# Altium PCB PCB1.PcbDoc (part 3 of 3)
Units mm, origin at the board's own origin, x right, y up, seen from the top; angles counter-clockwise.
Board outline 100 x 100 mm, 2 copper layers (Top Layer, Bottom Layer); 16 components, 62 nets, 154 pads, 113 vias.
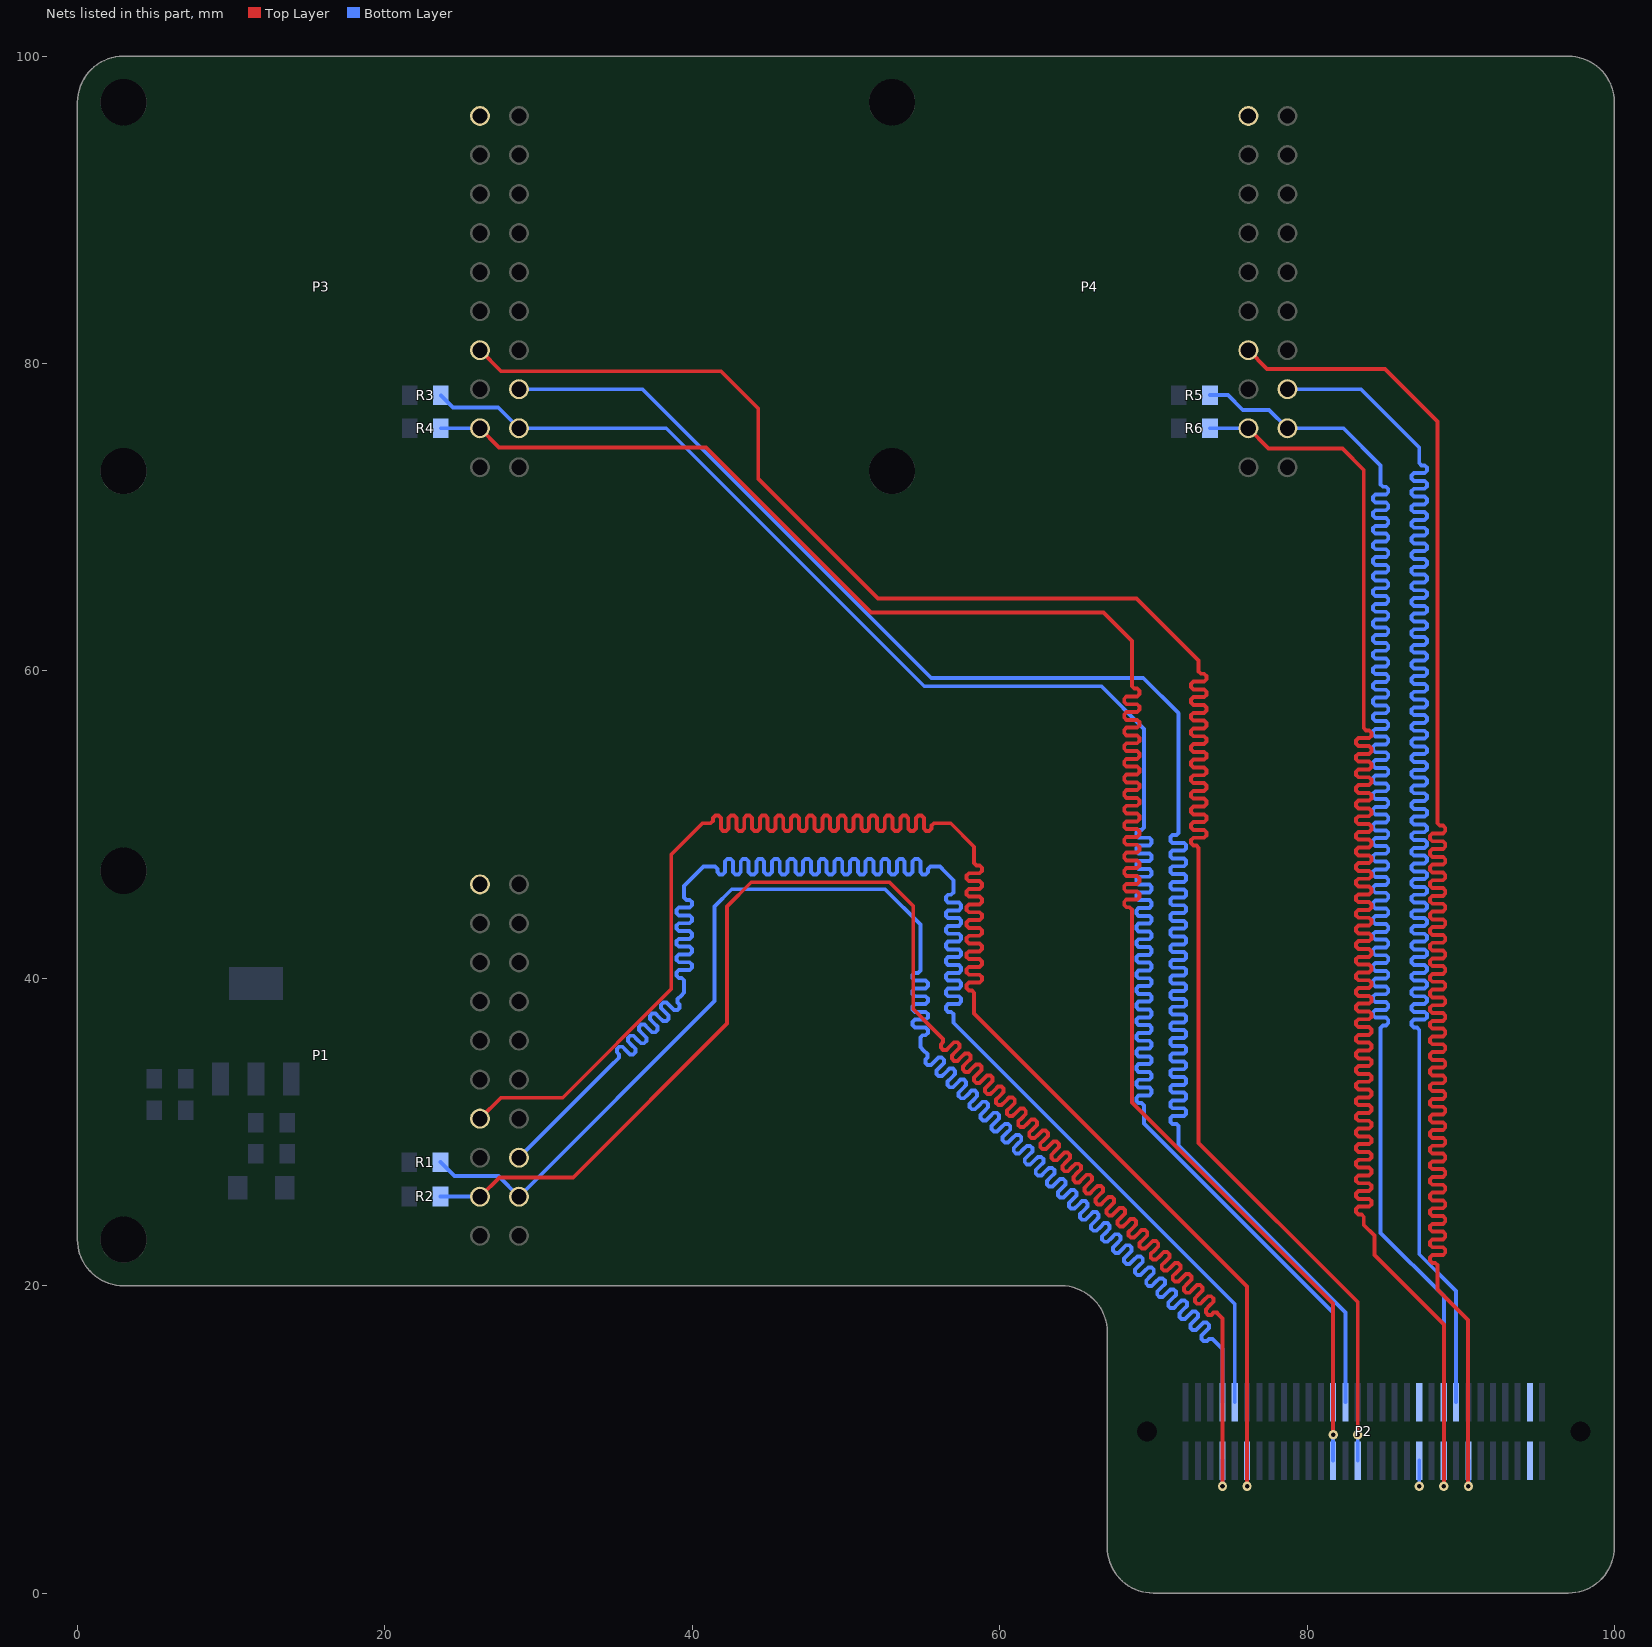
[diagram p3: the nets of this part, all layers, seen from the top]

## Via types
v1: diameter 1, hole 0.5, Top Layer to Bottom Layer, 87 vias
v2: diameter 0.6, hole 0.3, Top Layer to Bottom Layer, 22 vias
v3: diameter 0.8, hole 0.4, Top Layer to Bottom Layer, 2 vias
v4: diameter 3, hole 3, Top Layer to Bottom Layer, 2 vias

## Nets (pads, with @x,y where several pads share a name; then routed paths per layer and width w, separated by ;. In a path a pad name is that pad's centre, name@x,y a point inside that pad or via, vN(x,y) a via of type N, cw(c..) or ccw(c..) an arc to the next point about the centre after c; other vN are vias at no path point) (continued)
SCK_1: P1.3 P2.7 R1.2 | length 132.3
  Bottom Layer w0.254: R1.2@23.622,28.042 24.536,27.127 27.391,27.127 P1.3@28.727,25.791 41.453,38.517 41.453,44.679 42.57,45.796 52.553,45.796 54.839,43.51 54.839,42.621 54.839,40.513 54.686,40.361 54.491,40.361 54.339,40.208 54.339,40.005 54.491,39.853 54.839,39.853 55.186,39.853 55.339,39.7 55.339,39.497 55.186,39.345 54.839,39.345 54.491,39.345 54.339,39.192 54.339,38.989 54.491,38.837 54.839,38.837 55.186,38.837 55.339,38.684 55.339,38.481 55.186,38.329 54.839,38.329 54.491,38.329 54.339,38.176 54.339,37.973 54.491,37.821 54.839,37.821 55.186,37.821 55.339,37.668 55.339,37.465 55.186,37.313 54.839,37.313 54.491,37.313 54.339,37.16 54.339,36.957 54.491,36.805 54.839,36.805 55.186,36.805 55.339,36.652 55.339,36.449 55.186,36.297 54.991,36.297 54.839,36.144 54.839,35.789 54.839,35.535 55.055,35.318 55.307,35.066 55.307,34.851 55.169,34.713 55.169,34.497 55.313,34.354 55.528,34.354 55.774,34.599 56.02,34.845 56.235,34.845 56.379,34.701 56.379,34.486 56.133,34.24 55.887,33.994 55.887,33.779 56.031,33.635 56.247,33.635 56.492,33.881 56.738,34.127 56.954,34.127 57.097,33.983 57.097,33.767 56.852,33.522 56.606,33.276 56.606,33.06 56.749,32.917 56.965,32.917 57.211,33.162 57.457,33.408 57.672,33.408 57.816,33.265 57.816,33.049 57.57,32.803 57.324,32.557 57.324,32.342 57.468,32.198 57.683,32.198 57.929,32.444 58.175,32.69 58.39,32.69 58.534,32.546 58.534,32.331 58.288,32.085 58.043,31.839 58.043,31.624 58.186,31.48 58.402,31.48 58.648,31.726 58.893,31.971 59.109,31.971 59.253,31.828 59.253,31.612 59.007,31.366 58.761,31.121 58.761,30.905 58.905,30.761 59.12,30.761 59.366,31.007 59.612,31.253 59.827,31.253 59.971,31.109 59.971,30.894 59.725,30.648 59.479,30.402 59.479,30.187 59.623,30.043 59.839,30.043 60.084,30.289 60.33,30.535 60.546,30.535 60.689,30.391 60.689,30.175 60.444,29.93 60.198,29.684 60.198,29.468 60.342,29.325 60.557,29.325 60.803,29.57 61.049,29.816 61.264,29.816 61.408,29.672 61.408,29.457 61.162,29.211 60.916,28.965 60.916,28.75 61.06,28.606 61.275,28.606 61.521,28.852 61.767,29.098 61.983,29.098 62.126,28.954 62.126,28.739 61.88,28.493 61.635,28.247 61.635,28.031 61.778,27.888 61.994,27.888 62.24,28.134 62.485,28.379 62.701,28.379 62.845,28.236 62.845,28.02 62.599,27.774 62.353,27.529 62.353,27.313 62.497,27.169 62.712,27.169 62.958,27.415 63.204,27.661 63.419,27.661 63.563,27.517 63.563,27.302 63.317,27.056 63.072,26.81 63.072,26.595 63.215,26.451 63.431,26.451 63.677,26.697 63.922,26.942 64.138,26.942 64.282,26.799 64.282,26.583 64.036,26.337 63.79,26.092 63.79,25.876 63.934,25.732 64.149,25.732 64.395,25.978 64.641,26.224 64.856,26.224 65,26.08 65,25.865 64.754,25.619 64.508,25.373 64.508,25.158 64.652,25.014 64.868,25.014 65.113,25.26 65.359,25.506 65.575,25.506 65.718,25.362 65.718,25.146 65.473,24.901 65.227,24.655 65.227,24.439 65.37,24.296 65.586,24.296 65.832,24.541 66.078,24.787 66.293,24.787 66.437,24.644 66.437,24.428 66.191,24.182 65.945,23.936 65.945,23.721 66.089,23.577 66.304,23.577 66.55,23.823 66.796,24.069 67.012,24.069 67.155,23.925 67.155,23.71 66.909,23.464 66.664,23.218 66.664,23.002 66.807,22.859 67.023,22.859 67.269,23.105 67.514,23.35 67.73,23.35 67.874,23.207 67.874,22.991 67.628,22.745 67.382,22.5 67.382,22.284 67.526,22.14 67.741,22.14 67.987,22.386 68.233,22.632 68.448,22.632 68.592,22.488 68.592,22.273 68.346,22.027 68.1,21.781 68.1,21.566 68.244,21.422 68.46,21.422 68.705,21.668 68.951,21.914 69.167,21.914 69.31,21.77 69.31,21.554 69.065,21.309 68.819,21.063 68.819,20.847 68.963,20.704 69.178,20.704 69.424,20.949 69.67,21.195 69.885,21.195 70.029,21.051 70.029,20.836 69.783,20.59 69.537,20.344 69.537,20.129 69.681,19.985 69.896,19.985 70.142,20.231 70.388,20.477 70.604,20.477 70.747,20.333 70.747,20.117 70.502,19.872 70.256,19.626 70.256,19.41 70.399,19.267 70.615,19.267 70.861,19.512 71.107,19.758 71.322,19.758 71.466,19.615 71.466,19.399 71.22,19.153 70.974,18.907 70.974,18.692 71.118,18.548 71.333,18.548 71.579,18.794 71.825,19.04 72.04,19.04 72.184,18.896 72.184,18.681 71.938,18.435 71.693,18.189 71.693,17.974 71.836,17.83 72.052,17.83 72.298,18.076 72.543,18.321 72.759,18.321 72.903,18.178 72.903,17.962 72.657,17.716 72.411,17.471 72.411,17.255 72.555,17.111 72.77,17.111 73.016,17.357 73.262,17.603 73.477,17.603 73.621,17.459 73.621,17.244 73.375,16.998 73.129,16.752 73.129,16.537 73.273,16.393 73.489,16.393 73.627,16.531 73.842,16.531 73.914,16.459 74.5,15.873 P2.7@74.5,12.425
SCK_2: P2.25 P3.3 R3.2 | length 132.2
  Bottom Layer w0.254: R3.2@23.647,77.927 24.435,77.14 27.379,77.14 P3.3@28.727,75.791 38.306,75.791 55.093,59.004 66.624,59.004 69.393,56.236 69.393,53.721 69.393,49.809 69.24,49.657 69.045,49.657 68.893,49.505 68.893,49.301 69.045,49.149 69.393,49.149 69.74,49.149 69.893,48.997 69.893,48.793 69.74,48.641 69.393,48.641 69.045,48.641 68.893,48.489 68.893,48.285 69.045,48.133 69.393,48.133 69.74,48.133 69.893,47.981 69.893,47.777 69.74,47.625 69.393,47.625 69.045,47.625 68.893,47.473 68.893,47.269 69.045,47.117 69.393,47.117 69.74,47.117 69.893,46.965 69.893,46.761 69.74,46.609 69.393,46.609 69.045,46.609 68.893,46.457 68.893,46.253 69.045,46.101 69.393,46.101 69.74,46.101 69.893,45.949 69.893,45.745 69.74,45.593 69.393,45.593 69.045,45.593 68.893,45.441 68.893,45.237 69.045,45.085 69.393,45.085 69.74,45.085 69.893,44.933 69.893,44.729 69.74,44.577 69.393,44.577 69.045,44.577 68.893,44.425 68.893,44.221 69.045,44.069 69.393,44.069 69.74,44.069 69.893,43.917 69.893,43.713 69.74,43.561 69.393,43.561 69.045,43.561 68.893,43.409 68.893,43.205 69.045,43.053 69.393,43.053 69.74,43.053 69.893,42.901 69.893,42.697 69.74,42.545 69.393,42.545 69.045,42.545 68.893,42.393 68.893,42.189 69.045,42.037 69.393,42.037 69.74,42.037 69.893,41.885 69.893,41.681 69.74,41.529 69.393,41.529 69.045,41.529 68.893,41.377 68.893,41.173 69.045,41.021 69.393,41.021 69.74,41.021 69.893,40.869 69.893,40.665 69.74,40.513 69.393,40.513 69.045,40.513 68.893,40.361 68.893,40.157 69.045,40.005 69.393,40.005 69.74,40.005 69.893,39.853 69.893,39.649 69.74,39.497 69.393,39.497 69.045,39.497 68.893,39.345 68.893,39.141 69.045,38.989 69.393,38.989 69.74,38.989 69.893,38.837 69.893,38.633 69.74,38.481 69.393,38.481 69.045,38.481 68.893,38.329 68.893,38.125 69.045,37.973 69.393,37.973 69.74,37.973 69.893,37.821 69.893,37.617 69.74,37.465 69.393,37.465 69.045,37.465 68.893,37.313 68.893,37.109 69.045,36.957 69.393,36.957 69.74,36.957 69.893,36.805 69.893,36.601 69.74,36.449 69.393,36.449 69.045,36.449 68.893,36.297 68.893,36.093 69.045,35.941 69.393,35.941 69.74,35.941 69.893,35.789 69.893,35.585 69.74,35.433 69.393,35.433 69.045,35.433 68.893,35.281 68.893,35.077 69.045,34.925 69.393,34.925 69.74,34.925 69.893,34.773 69.893,34.569 69.74,34.417 69.393,34.417 69.045,34.417 68.893,34.265 68.893,34.061 69.045,33.909 69.393,33.909 69.74,33.909 69.893,33.757 69.893,33.553 69.74,33.401 69.393,33.401 69.045,33.401 68.893,33.249 68.893,33.045 69.045,32.893 69.393,32.893 69.74,32.893 69.893,32.741 69.893,32.537 69.74,32.385 69.393,32.385 69.045,32.385 68.893,32.233 68.893,32.029 69.045,31.877 69.24,31.877 69.393,31.725 69.393,31.623 69.393,30.556 81.7,18.249 P2.25@81.7,12.425
SCK_3: P2.43 P4.3 R5.2 | length 132.2
  Bottom Layer w0.254: R5.2@73.685,77.953 74.854,77.953 75.819,76.987 77.531,76.987 P4.3@78.727,75.791 82.375,75.791 84.785,73.381 84.785,72.238 84.785,72.136 84.938,71.984 85.133,71.984 85.285,71.831 85.285,71.628 85.133,71.476 84.785,71.476 84.438,71.476 84.285,71.323 84.285,71.12 84.438,70.968 84.785,70.968 85.133,70.968 85.285,70.815 85.285,70.612 85.133,70.46 84.785,70.46 84.438,70.46 84.285,70.307 84.285,70.104 84.438,69.952 84.785,69.952 85.133,69.952 85.285,69.799 85.285,69.596 85.133,69.444 84.785,69.444 84.438,69.444 84.285,69.291 84.285,69.088 84.438,68.936 84.785,68.936 85.133,68.936 85.285,68.783 85.285,68.58 85.133,68.428 84.785,68.428 84.438,68.428 84.285,68.275 84.285,68.072 84.438,67.92 84.785,67.92 85.133,67.92 85.285,67.767 85.285,67.564 85.133,67.412 84.785,67.412 84.438,67.412 84.285,67.259 84.285,67.056 84.438,66.904 84.785,66.904 85.133,66.904 85.285,66.751 85.285,66.548 85.133,66.396 84.785,66.396 84.438,66.396 84.285,66.243 84.285,66.04 84.438,65.888 84.785,65.888 85.133,65.888 85.285,65.735 85.285,65.532 85.133,65.38 84.785,65.38 84.438,65.38 84.285,65.227 84.285,65.024 84.438,64.872 84.785,64.872 85.133,64.872 85.285,64.719 85.285,64.516 85.133,64.364 84.785,64.364 84.438,64.364 84.285,64.211 84.285,64.008 84.438,63.856 84.785,63.856 85.133,63.856 85.285,63.703 85.285,63.5 85.133,63.348 84.785,63.348 84.438,63.348 84.285,63.195 84.285,62.992 84.438,62.84 84.785,62.84 85.133,62.84 85.285,62.687 85.285,62.484 85.133,62.332 84.785,62.332 84.438,62.332 84.285,62.179 84.285,61.976 84.438,61.824 84.785,61.824 85.133,61.824 85.285,61.671 85.285,61.468 85.133,61.316 84.785,61.316 84.438,61.316 84.285,61.163 84.285,60.96 84.438,60.808 84.785,60.808 85.133,60.808 85.285,60.655 85.285,60.452 85.133,60.3 84.785,60.3 84.438,60.3 84.285,60.147 84.285,59.944 84.438,59.792 84.785,59.792 85.133,59.792 85.285,59.639 85.285,59.436 85.133,59.284 84.785,59.284 84.438,59.284 84.285,59.131 84.285,58.928 84.438,58.776 84.785,58.776 85.133,58.776 85.285,58.623 85.285,58.42 85.133,58.268 84.785,58.268 84.438,58.268 84.285,58.115 84.285,57.912 84.438,57.76 84.785,57.76 85.133,57.76 85.285,57.607 85.285,57.404 85.133,57.252 84.785,57.252 84.438,57.252 84.285,57.099 84.285,56.896 84.438,56.744 84.785,56.744 85.133,56.744 85.285,56.591 85.285,56.388 85.133,56.236 84.785,56.236 84.438,56.236 84.285,56.083 84.285,55.88 84.438,55.728 84.785,55.728 85.133,55.728 85.285,55.575 85.285,55.372 85.133,55.22 84.785,55.22 84.438,55.22 84.285,55.067 84.285,54.864 84.438,54.712 84.785,54.712 85.133,54.712 85.285,54.559 85.285,54.356 85.133,54.204 84.785,54.204 84.438,54.204 84.285,54.051 84.285,53.848 84.438,53.696 84.785,53.696 85.133,53.696 85.285,53.543 85.285,53.34 85.133,53.188 84.785,53.188 84.438,53.188 84.285,53.035 84.285,52.832 84.438,52.68 84.785,52.68 85.133,52.68 85.285,52.527 85.285,52.324 85.133,52.172 84.785,52.172 84.438,52.172 84.285,52.019 84.285,51.816 84.438,51.664 84.785,51.664 85.133,51.664 85.285,51.511 85.285,51.308 85.133,51.156 84.785,51.156 84.438,51.156 84.285,51.003 84.285,50.8 84.438,50.648 84.785,50.648 85.133,50.648 85.285,50.495 85.285,50.292 85.133,50.14 84.785,50.14 84.438,50.14 84.285,49.987 84.285,49.784 84.438,49.632 84.785,49.632 85.133,49.632 85.285,49.479 85.285,49.276 85.133,49.124 84.785,49.124 84.438,49.124 84.285,48.971 84.285,48.768 84.438,48.616 84.785,48.616 85.133,48.616 85.285,48.463 85.285,48.26 85.133,48.108 84.785,48.108 84.438,48.108 84.285,47.955 84.285,47.752 84.438,47.6 84.785,47.6 85.133,47.6 85.285,47.447 85.285,47.244 85.133,47.092 84.785,47.092 84.438,47.092 84.285,46.939 84.285,46.736 84.438,46.584 84.785,46.584 85.133,46.584 85.285,46.431 85.285,46.228 85.133,46.076 84.785,46.076 84.438,46.076 84.285,45.923 84.285,45.72 84.438,45.568 84.785,45.568 85.133,45.568 85.285,45.415 85.285,45.212 85.133,45.06 84.785,45.06 84.438,45.06 84.285,44.907 84.285,44.704 84.438,44.552 84.785,44.552 85.133,44.552 85.285,44.399 85.285,44.196 85.133,44.044 84.785,44.044 84.438,44.044 84.285,43.891 84.285,43.688 84.438,43.536 84.785,43.536 85.133,43.536 85.285,43.383 85.285,43.18 85.133,43.028 84.785,43.028 84.438,43.028 84.285,42.875 84.285,42.672 84.438,42.52 84.785,42.52 85.133,42.52 85.285,42.367 85.285,42.164 85.133,42.012 84.785,42.012 84.438,42.012 84.285,41.859 84.285,41.656 84.438,41.504 84.785,41.504 85.133,41.504 85.285,41.351 85.285,41.148 85.133,40.996 84.785,40.996 84.438,40.996 84.285,40.843 84.285,40.64 84.438,40.488 84.785,40.488 85.133,40.488 85.285,40.335 85.285,40.132 85.133,39.98 84.785,39.98 84.438,39.98 84.285,39.827 84.285,39.624 84.438,39.472 84.785,39.472 85.133,39.472 85.285,39.319 85.285,39.116 85.133,38.964 84.785,38.964 84.438,38.964 84.285,38.811 84.285,38.608 84.438,38.456 84.785,38.456 85.133,38.456 85.285,38.303 85.285,38.1 85.133,37.948 84.785,37.948 84.438,37.948 84.285,37.795 84.285,37.592 84.438,37.44 84.785,37.44 85.133,37.44 85.285,37.287 85.285,37.084 85.133,36.932 84.938,36.932 84.785,36.779 84.785,33.045 84.785,23.444 88.9,19.329 P2.43@88.9,12.425
SDA_1: P1.4 P2.8 R2.2 | length 132.2
  Top Layer w0.254: P1.4@26.187,25.791 27.447,27.051 32.258,27.051 42.266,37.059 42.266,44.679 43.84,46.253 52.832,46.253 54.381,44.704 54.381,37.998 55.639,36.741 56.317,36.062 56.317,35.847 56.179,35.709 56.179,35.493 56.323,35.35 56.539,35.35 56.784,35.595 57.03,35.841 57.246,35.841 57.389,35.698 57.389,35.482 57.144,35.236 56.898,34.99 56.898,34.775 57.042,34.631 57.257,34.631 57.503,34.877 57.749,35.123 57.964,35.123 58.108,34.979 58.108,34.764 57.862,34.518 57.616,34.272 57.616,34.056 57.76,33.913 57.975,33.913 58.221,34.159 58.467,34.404 58.683,34.404 58.826,34.261 58.826,34.045 58.58,33.799 58.335,33.554 58.335,33.338 58.478,33.194 58.694,33.194 58.94,33.44 59.185,33.686 59.401,33.686 59.545,33.542 59.545,33.327 59.299,33.081 59.053,32.835 59.053,32.62 59.197,32.476 59.412,32.476 59.658,32.722 59.904,32.968 60.119,32.968 60.263,32.824 60.263,32.608 60.017,32.363 59.772,32.117 59.772,31.901 59.915,31.758 60.131,31.758 60.377,32.003 60.622,32.249 60.838,32.249 60.982,32.105 60.982,31.89 60.736,31.644 60.49,31.398 60.49,31.183 60.634,31.039 60.849,31.039 61.095,31.285 61.341,31.531 61.556,31.531 61.7,31.387 61.7,31.171 61.454,30.926 61.208,30.68 61.208,30.464 61.352,30.321 61.568,30.321 61.813,30.566 62.059,30.812 62.275,30.812 62.418,30.669 62.418,30.453 62.173,30.207 61.927,29.961 61.927,29.746 62.07,29.602 62.286,29.602 62.532,29.848 62.778,30.094 62.993,30.094 63.137,29.95 63.137,29.735 62.891,29.489 62.645,29.243 62.645,29.028 62.789,28.884 63.004,28.884 63.25,29.13 63.496,29.375 63.712,29.375 63.855,29.232 63.855,29.016 63.609,28.77 63.364,28.525 63.364,28.309 63.507,28.165 63.723,28.165 63.969,28.411 64.214,28.657 64.43,28.657 64.574,28.513 64.574,28.298 64.328,28.052 64.082,27.806 64.082,27.591 64.226,27.447 64.441,27.447 64.687,27.693 64.933,27.939 65.148,27.939 65.292,27.795 65.292,27.579 65.046,27.334 64.8,27.088 64.8,26.872 64.944,26.729 65.16,26.729 65.405,26.974 65.651,27.22 65.867,27.22 66.01,27.076 66.01,26.861 65.765,26.615 65.519,26.369 65.519,26.154 65.663,26.01 65.878,26.01 66.124,26.256 66.37,26.502 66.585,26.502 66.729,26.358 66.729,26.143 66.483,25.897 66.237,25.651 66.237,25.435 66.381,25.292 66.596,25.292 66.842,25.538 67.088,25.783 67.304,25.783 67.447,25.64 67.447,25.424 67.202,25.178 66.956,24.933 66.956,24.717 67.099,24.573 67.315,24.573 67.561,24.819 67.807,25.065 68.022,25.065 68.166,24.921 68.166,24.706 67.92,24.46 67.674,24.214 67.674,23.999 67.818,23.855 68.033,23.855 68.279,24.101 68.525,24.346 68.74,24.346 68.884,24.203 68.884,23.987 68.638,23.741 68.393,23.496 68.393,23.28 68.536,23.136 68.752,23.136 68.998,23.382 69.243,23.628 69.459,23.628 69.603,23.484 69.603,23.269 69.357,23.023 69.111,22.777 69.111,22.562 69.255,22.418 69.47,22.418 69.716,22.664 69.962,22.91 70.177,22.91 70.321,22.766 70.321,22.55 70.075,22.305 69.829,22.059 69.829,21.843 69.973,21.7 70.189,21.7 70.434,21.945 70.68,22.191 70.896,22.191 71.039,22.048 71.039,21.832 70.794,21.586 70.548,21.34 70.548,21.125 70.691,20.981 70.907,20.981 71.153,21.227 71.399,21.473 71.614,21.473 71.758,21.329 71.758,21.114 71.512,20.868 71.266,20.622 71.266,20.406 71.41,20.263 71.625,20.263 71.871,20.509 72.117,20.754 72.333,20.754 72.476,20.611 72.476,20.395 72.23,20.149 71.985,19.904 71.985,19.688 72.128,19.544 72.344,19.544 72.59,19.79 72.835,20.036 73.051,20.036 73.195,19.892 73.195,19.677 72.949,19.431 72.703,19.185 72.703,18.97 72.847,18.826 73.062,18.826 73.308,19.072 73.554,19.318 73.769,19.318 73.913,19.174 73.913,18.958 73.667,18.713 73.421,18.467 73.421,18.251 73.565,18.108 73.781,18.108 73.919,18.246 74.134,18.246 74.206,18.174 74.5,17.88 v2(74.5,6.948)
  Bottom Layer w0.254: R2.2@23.622,25.806 P1.4@26.172,25.806 ; v2(74.5,6.948) P2.8@74.5,8.625
SDA_2: P2.26 P3.4 R4.2 | length 132.3
  Top Layer w0.254: P3.4@26.187,75.791 27.43,74.549 40.894,74.549 51.638,63.805 66.751,63.805 68.605,61.951 68.605,59.106 68.605,59.004 68.758,58.852 68.953,58.852 69.105,58.699 69.105,58.496 68.953,58.344 68.605,58.344 68.258,58.344 68.105,58.191 68.105,57.988 68.258,57.836 68.605,57.836 68.953,57.836 69.105,57.683 69.105,57.48 68.953,57.328 68.605,57.328 68.258,57.328 68.105,57.175 68.105,56.972 68.258,56.82 68.605,56.82 68.953,56.82 69.105,56.667 69.105,56.464 68.953,56.312 68.605,56.312 68.258,56.312 68.105,56.159 68.105,55.956 68.258,55.804 68.605,55.804 68.953,55.804 69.105,55.651 69.105,55.448 68.953,55.296 68.605,55.296 68.258,55.296 68.105,55.143 68.105,54.94 68.258,54.788 68.605,54.788 68.953,54.788 69.105,54.635 69.105,54.432 68.953,54.28 68.605,54.28 68.258,54.28 68.105,54.127 68.105,53.924 68.258,53.772 68.605,53.772 68.953,53.772 69.105,53.619 69.105,53.416 68.953,53.264 68.605,53.264 68.258,53.264 68.105,53.111 68.105,52.908 68.258,52.756 68.605,52.756 68.953,52.756 69.105,52.603 69.105,52.4 68.953,52.248 68.605,52.248 68.258,52.248 68.105,52.095 68.105,51.892 68.258,51.74 68.605,51.74 68.953,51.74 69.105,51.587 69.105,51.384 68.953,51.232 68.605,51.232 68.258,51.232 68.105,51.079 68.105,50.876 68.258,50.724 68.605,50.724 68.953,50.724 69.105,50.571 69.105,50.368 68.953,50.216 68.605,50.216 68.258,50.216 68.105,50.063 68.105,49.86 68.258,49.708 68.605,49.708 68.953,49.708 69.105,49.555 69.105,49.352 68.953,49.2 68.605,49.2 68.258,49.2 68.105,49.047 68.105,48.844 68.258,48.692 68.605,48.692 68.953,48.692 69.105,48.539 69.105,48.336 68.953,48.184 68.605,48.184 68.258,48.184 68.105,48.031 68.105,47.828 68.258,47.676 68.605,47.676 68.953,47.676 69.105,47.523 69.105,47.32 68.953,47.168 68.605,47.168 68.258,47.168 68.105,47.015 68.105,46.812 68.258,46.66 68.605,46.66 68.953,46.66 69.105,46.507 69.105,46.304 68.953,46.152 68.605,46.152 68.258,46.152 68.105,45.999 68.105,45.796 68.258,45.644 68.605,45.644 68.953,45.644 69.105,45.491 69.105,45.288 68.953,45.136 68.605,45.136 68.258,45.136 68.105,44.983 68.105,44.78 68.258,44.628 68.453,44.628 68.605,44.475 68.605,42.062 68.605,31.928 81.7,18.833 v2(81.7,10.302)
  Bottom Layer w0.254: R4.2@23.647,75.794 26.185,75.794 P3.4@26.187,75.791 ; P2.26@81.7,8.625 v2(81.7,10.302)
SDA_3: P2.44 P4.4 R6.2 | length 131.8
  Top Layer w0.254: P4.4@76.187,75.791 77.506,74.473 82.296,74.473 83.693,73.076 83.693,56.566 83.693,56.286 83.845,56.134 84.041,56.134 84.193,55.982 84.193,55.778 84.041,55.626 83.693,55.626 83.345,55.626 83.193,55.474 83.193,55.27 83.345,55.118 83.693,55.118 84.041,55.118 84.193,54.966 84.193,54.762 84.041,54.61 83.693,54.61 83.345,54.61 83.193,54.458 83.193,54.254 83.345,54.102 83.693,54.102 84.041,54.102 84.193,53.95 84.193,53.746 84.041,53.594 83.693,53.594 83.345,53.594 83.193,53.442 83.193,53.238 83.345,53.086 83.693,53.086 84.041,53.086 84.193,52.934 84.193,52.73 84.041,52.578 83.693,52.578 83.345,52.578 83.193,52.426 83.193,52.222 83.345,52.07 83.693,52.07 84.041,52.07 84.193,51.918 84.193,51.714 84.041,51.562 83.693,51.562 83.345,51.562 83.193,51.41 83.193,51.206 83.345,51.054 83.693,51.054 84.041,51.054 84.193,50.902 84.193,50.698 84.041,50.546 83.693,50.546 83.345,50.546 83.193,50.394 83.193,50.19 83.345,50.038 83.693,50.038 84.041,50.038 84.193,49.886 84.193,49.682 84.041,49.53 83.693,49.53 83.345,49.53 83.193,49.378 83.193,49.174 83.345,49.022 83.693,49.022 84.041,49.022 84.193,48.87 84.193,48.666 84.041,48.514 83.693,48.514 83.345,48.514 83.193,48.362 83.193,48.158 83.345,48.006 83.693,48.006 84.041,48.006 84.193,47.854 84.193,47.65 84.041,47.498 83.693,47.498 83.345,47.498 83.193,47.346 83.193,47.142 83.345,46.99 83.693,46.99 84.041,46.99 84.193,46.838 84.193,46.634 84.041,46.482 83.693,46.482 83.345,46.482 83.193,46.33 83.193,46.126 83.345,45.974 83.693,45.974 84.041,45.974 84.193,45.822 84.193,45.618 84.041,45.466 83.693,45.466 83.345,45.466 83.193,45.314 83.193,45.11 83.345,44.958 83.693,44.958 84.041,44.958 84.193,44.806 84.193,44.602 84.041,44.45 83.693,44.45 83.345,44.45 83.193,44.298 83.193,44.094 83.345,43.942 83.693,43.942 84.041,43.942 84.193,43.79 84.193,43.586 84.041,43.434 83.693,43.434 83.345,43.434 83.193,43.282 83.193,43.078 83.345,42.926 83.693,42.926 84.041,42.926 84.193,42.774 84.193,42.57 84.041,42.418 83.693,42.418 83.345,42.418 83.193,42.266 83.193,42.062 83.345,41.91 83.693,41.91 84.041,41.91 84.193,41.758 84.193,41.554 84.041,41.402 83.693,41.402 83.345,41.402 83.193,41.25 83.193,41.046 83.345,40.894 83.693,40.894 84.041,40.894 84.193,40.742 84.193,40.538 84.041,40.386 83.693,40.386 83.345,40.386 83.193,40.234 83.193,40.03 83.345,39.878 83.693,39.878 84.041,39.878 84.193,39.726 84.193,39.522 84.041,39.37 83.693,39.37 83.345,39.37 83.193,39.218 83.193,39.014 83.345,38.862 83.693,38.862 84.041,38.862 84.193,38.71 84.193,38.506 84.041,38.354 83.693,38.354 83.345,38.354 83.193,38.202 83.193,37.998 83.345,37.846 83.693,37.846 84.041,37.846 84.193,37.694 84.193,37.49 84.041,37.338 83.693,37.338 83.345,37.338 83.193,37.186 83.193,36.982 83.345,36.83 83.693,36.83 84.041,36.83 84.193,36.678 84.193,36.474 84.041,36.322 83.693,36.322 83.345,36.322 83.193,36.17 83.193,35.966 83.345,35.814 83.693,35.814 84.041,35.814 84.193,35.662 84.193,35.458 84.041,35.306 83.693,35.306 83.345,35.306 83.193,35.154 83.193,34.95 83.345,34.798 83.693,34.798 84.041,34.798 84.193,34.646 84.193,34.442 84.041,34.29 83.693,34.29 83.345,34.29 83.193,34.138 83.193,33.934 83.345,33.782 83.693,33.782 84.041,33.782 84.193,33.63 84.193,33.426 84.041,33.274 83.693,33.274 83.345,33.274 83.193,33.122 83.193,32.918 83.345,32.766 83.693,32.766 84.041,32.766 84.193,32.614 84.193,32.41 84.041,32.258 83.693,32.258 83.345,32.258 83.193,32.106 83.193,31.902 83.345,31.75 83.693,31.75 84.041,31.75 84.193,31.598 84.193,31.394 84.041,31.242 83.693,31.242 83.345,31.242 83.193,31.09 83.193,30.886 83.345,30.734 83.693,30.734 84.041,30.734 84.193,30.582 84.193,30.378 84.041,30.226 83.693,30.226 83.345,30.226 83.193,30.074 83.193,29.87 83.345,29.718 83.693,29.718 84.041,29.718 84.193,29.566 84.193,29.362 84.041,29.21 83.693,29.21 83.345,29.21 83.193,29.058 83.193,28.854 83.345,28.702 83.693,28.702 84.041,28.702 84.193,28.55 84.193,28.346 84.041,28.194 83.693,28.194 83.345,28.194 83.193,28.042 83.193,27.838 83.345,27.686 83.693,27.686 84.041,27.686 84.193,27.534 84.193,27.33 84.041,27.178 83.693,27.178 83.345,27.178 83.193,27.026 83.193,26.822 83.345,26.67 83.693,26.67 84.041,26.67 84.193,26.518 84.193,26.314 84.041,26.162 83.693,26.162 83.345,26.162 83.193,26.01 83.193,25.806 83.345,25.654 83.693,25.654 84.041,25.654 84.193,25.502 84.193,25.298 84.041,25.146 83.693,25.146 83.345,25.146 83.193,24.994 83.193,24.79 83.345,24.638 83.541,24.638 83.693,24.486 83.693,24.384 83.693,23.952 84.379,23.266 84.379,21.996 88.9,17.475 v2(88.9,6.948)
  Bottom Layer w0.254: R6.2@73.685,75.794 76.185,75.794 P4.4@76.187,75.791 ; v2(88.9,6.948) P2.44@88.9,8.625
STRO_1: P1.20
STRO_2: P3.20
STRO_3: P4.20
T10: P2.58
T11: P2.57
V16: P2.39
VS_1: P1.5 P2.9 | length 132.3
  Bottom Layer w0.254: P1.5@28.727,28.331 34.653,34.257 35.233,34.837 35.233,35.052 35.095,35.19 35.095,35.406 35.239,35.549 35.454,35.549 35.7,35.304 35.946,35.058 36.161,35.058 36.305,35.202 36.305,35.417 36.059,35.663 35.813,35.909 35.813,36.124 35.957,36.268 36.173,36.268 36.418,36.022 36.664,35.776 36.88,35.776 37.023,35.92 37.023,36.136 36.778,36.381 36.532,36.627 36.532,36.843 36.675,36.986 36.891,36.986 37.137,36.741 37.383,36.495 37.598,36.495 37.742,36.638 37.742,36.854 37.496,37.1 37.25,37.346 37.25,37.561 37.394,37.705 37.609,37.705 37.855,37.459 38.101,37.213 38.316,37.213 38.46,37.357 38.46,37.572 38.214,37.818 37.969,38.064 37.969,38.279 38.112,38.423 38.328,38.423 38.574,38.177 38.819,37.932 39.035,37.932 39.179,38.075 39.179,38.291 39.041,38.429 39.041,38.644 39.292,38.896 39.472,39.075 39.472,39.522 39.472,39.878 39.319,40.03 39.124,40.03 38.972,40.183 38.972,40.386 39.124,40.538 39.472,40.538 39.819,40.538 39.972,40.691 39.972,40.894 39.819,41.046 39.472,41.046 39.124,41.046 38.972,41.199 38.972,41.402 39.124,41.554 39.472,41.554 39.819,41.554 39.972,41.707 39.972,41.91 39.819,42.062 39.472,42.062 39.124,42.062 38.972,42.215 38.972,42.418 39.124,42.57 39.472,42.57 39.819,42.57 39.972,42.723 39.972,42.926 39.819,43.078 39.472,43.078 39.124,43.078 38.972,43.231 38.972,43.434 39.124,43.586 39.472,43.586 39.819,43.586 39.972,43.739 39.972,43.942 39.819,44.094 39.472,44.094 39.124,44.094 38.972,44.247 38.972,44.45 39.124,44.602 39.472,44.602 39.819,44.602 39.972,44.755 39.972,44.958 39.819,45.11 39.624,45.11 39.472,45.263 39.472,45.364 39.472,45.999 40.742,47.269 41.173,47.269 41.478,47.269 41.631,47.117 41.631,46.922 41.783,46.769 41.986,46.769 42.139,46.922 42.139,47.269 42.139,47.617 42.291,47.769 42.494,47.769 42.647,47.617 42.647,47.269 42.647,46.922 42.799,46.769 43.002,46.769 43.155,46.922 43.155,47.269 43.155,47.617 43.307,47.769 43.51,47.769 43.663,47.617 43.663,47.269 43.663,46.922 43.815,46.769 44.018,46.769 44.171,46.922 44.171,47.269 44.171,47.617 44.323,47.769 44.526,47.769 44.679,47.617 44.679,47.269 44.679,46.922 44.831,46.769 45.034,46.769 45.187,46.922 45.187,47.269 45.187,47.617 45.339,47.769 45.542,47.769 45.695,47.617 45.695,47.269 45.695,46.922 45.847,46.769 46.05,46.769 46.203,46.922 46.203,47.269 46.203,47.617 46.355,47.769 46.558,47.769 46.711,47.617 46.711,47.269 46.711,46.922 46.863,46.769 47.066,46.769 47.219,46.922 47.219,47.269 47.219,47.617 47.371,47.769 47.574,47.769 47.727,47.617 47.727,47.269 47.727,46.922 47.879,46.769 48.082,46.769 48.235,46.922 48.235,47.269 48.235,47.617 48.387,47.769 48.59,47.769 48.743,47.617 48.743,47.269 48.743,46.922 48.895,46.769 49.098,46.769 49.251,46.922 49.251,47.269 49.251,47.617 49.403,47.769 49.606,47.769 49.759,47.617 49.759,47.269 49.759,46.922 49.911,46.769 50.114,46.769 50.267,46.922 50.267,47.269 50.267,47.617 50.419,47.769 50.622,47.769 50.775,47.617 50.775,47.269 50.775,46.922 50.927,46.769 51.13,46.769 51.283,46.922 51.283,47.269 51.283,47.617 51.435,47.769 51.638,47.769 51.791,47.617 51.791,47.269 51.791,46.922 51.943,46.769 52.146,46.769 52.299,46.922 52.299,47.269 52.299,47.617 52.451,47.769 52.654,47.769 52.807,47.617 52.807,47.269 52.807,46.922 52.959,46.769 53.162,46.769 53.315,46.922 53.315,47.269 53.315,47.617 53.467,47.769 53.67,47.769 53.823,47.617 53.823,47.269 53.823,46.922 53.975,46.769 54.178,46.769 54.331,46.922 54.331,47.269 54.331,47.617 54.483,47.769 54.686,47.769 54.839,47.617 54.839,47.269 54.839,46.922 54.991,46.769 55.194,46.769 55.347,46.922 55.347,47.117 55.499,47.269 55.855,47.269 56.109,47.269 56.459,46.919 56.818,46.56 56.998,46.38 56.998,45.949 56.998,45.593 56.845,45.441 56.65,45.441 56.498,45.288 56.498,45.085 56.65,44.933 56.998,44.933 57.345,44.933 57.498,44.78 57.498,44.577 57.345,44.425 56.998,44.425 56.65,44.425 56.498,44.272 56.498,44.069 56.65,43.917 56.998,43.917 57.345,43.917 57.498,43.764 57.498,43.561 57.345,43.409 56.998,43.409 56.65,43.409 56.498,43.256 56.498,43.053 56.65,42.901 56.998,42.901 57.345,42.901 57.498,42.748 57.498,42.545 57.345,42.393 56.998,42.393 56.65,42.393 56.498,42.24 56.498,42.037 56.65,41.885 56.998,41.885 57.345,41.885 57.498,41.732 57.498,41.529 57.345,41.377 56.998,41.377 56.65,41.377 56.498,41.224 56.498,41.021 56.65,40.869 56.998,40.869 57.345,40.869 57.498,40.716 57.498,40.513 57.345,40.361 56.998,40.361 56.65,40.361 56.498,40.208 56.498,40.005 56.65,39.853 56.998,39.853 57.345,39.853 57.498,39.7 57.498,39.497 57.345,39.345 56.998,39.345 56.65,39.345 56.498,39.192 56.498,38.989 56.65,38.837 56.998,38.837 57.345,38.837 57.498,38.684 57.498,38.481 57.345,38.329 56.998,38.329 56.65,38.329 56.498,38.176 56.498,37.973 56.65,37.821 56.845,37.821 56.998,37.668 56.998,37.567 56.998,37.109 75.3,18.807 P2.9@75.3,12.425
VS_2: P2.27 P3.5 | length 132.3
  Bottom Layer w0.254: P3.5@28.727,78.331 36.756,78.331 55.55,59.538 69.342,59.538 71.628,57.252 71.628,52.857 71.628,49.454 71.501,49.327 71.255,49.327 71.128,49.2 71.128,48.946 71.255,48.819 71.628,48.819 72.001,48.819 72.128,48.692 72.128,48.438 72.001,48.311 71.628,48.311 71.255,48.311 71.128,48.184 71.128,47.93 71.255,47.803 71.628,47.803 72.001,47.803 72.128,47.676 72.128,47.422 72.001,47.295 71.628,47.295 71.255,47.295 71.128,47.168 71.128,46.914 71.255,46.787 71.628,46.787 72.001,46.787 72.128,46.66 72.128,46.406 72.001,46.279 71.628,46.279 71.255,46.279 71.128,46.152 71.128,45.898 71.255,45.771 71.628,45.771 72.001,45.771 72.128,45.644 72.128,45.39 72.001,45.263 71.628,45.263 71.255,45.263 71.128,45.136 71.128,44.882 71.255,44.755 71.628,44.755 72.001,44.755 72.128,44.628 72.128,44.374 72.001,44.247 71.628,44.247 71.255,44.247 71.128,44.12 71.128,43.866 71.255,43.739 71.628,43.739 72.001,43.739 72.128,43.612 72.128,43.358 72.001,43.231 71.628,43.231 71.255,43.231 71.128,43.104 71.128,42.85 71.255,42.723 71.628,42.723 72.001,42.723 72.128,42.596 72.128,42.342 72.001,42.215 71.628,42.215 71.255,42.215 71.128,42.088 71.128,41.834 71.255,41.707 71.628,41.707 72.001,41.707 72.128,41.58 72.128,41.326 72.001,41.199 71.628,41.199 71.255,41.199 71.128,41.072 71.128,40.818 71.255,40.691 71.628,40.691 72.001,40.691 72.128,40.564 72.128,40.31 72.001,40.183 71.628,40.183 71.255,40.183 71.128,40.056 71.128,39.802 71.255,39.675 71.628,39.675 72.001,39.675 72.128,39.548 72.128,39.294 72.001,39.167 71.628,39.167 71.255,39.167 71.128,39.04 71.128,38.786 71.255,38.659 71.628,38.659 72.001,38.659 72.128,38.532 72.128,38.278 72.001,38.151 71.628,38.151 71.255,38.151 71.128,38.024 71.128,37.77 71.255,37.643 71.628,37.643 72.001,37.643 72.128,37.516 72.128,37.262 72.001,37.135 71.628,37.135 71.255,37.135 71.128,37.008 71.128,36.754 71.255,36.627 71.628,36.627 72.001,36.627 72.128,36.5 72.128,36.246 72.001,36.119 71.628,36.119 71.255,36.119 71.128,35.992 71.128,35.738 71.255,35.611 71.628,35.611 72.001,35.611 72.128,35.484 72.128,35.23 72.001,35.103 71.628,35.103 71.255,35.103 71.128,34.976 71.128,34.722 71.255,34.595 71.628,34.595 72.001,34.595 72.128,34.468 72.128,34.214 72.001,34.087 71.628,34.087 71.255,34.087 71.128,33.96 71.128,33.706 71.255,33.579 71.628,33.579 72.001,33.579 72.128,33.452 72.128,33.198 72.001,33.071 71.628,33.071 71.255,33.071 71.128,32.944 71.128,32.69 71.255,32.563 71.628,32.563 72.001,32.563 72.128,32.436 72.128,32.182 72.001,32.055 71.628,32.055 71.255,32.055 71.128,31.928 71.128,31.674 71.255,31.547 71.628,31.547 72.001,31.547 72.128,31.42 72.128,31.166 72.001,31.039 71.628,31.039 71.255,31.039 71.128,30.912 71.128,30.658 71.255,30.531 71.501,30.531 71.628,30.404 71.628,30.277 71.628,29.134 82.5,18.262 P2.27@82.5,12.425
VS_3: P2.45 P4.5 | length 132.2
  Bottom Layer w0.254: P4.5@78.727,78.331 83.518,78.331 87.3,74.549 87.3,73.635 87.3,73.533 87.452,73.381 87.647,73.381 87.8,73.228 87.8,73.025 87.647,72.873 87.3,72.873 86.952,72.873 86.8,72.72 86.8,72.517 86.952,72.365 87.3,72.365 87.647,72.365 87.8,72.212 87.8,72.009 87.647,71.857 87.3,71.857 86.952,71.857 86.8,71.704 86.8,71.501 86.952,71.349 87.3,71.349 87.647,71.349 87.8,71.196 87.8,70.993 87.647,70.841 87.3,70.841 86.952,70.841 86.8,70.688 86.8,70.485 86.952,70.333 87.3,70.333 87.647,70.333 87.8,70.18 87.8,69.977 87.647,69.825 87.3,69.825 86.952,69.825 86.8,69.672 86.8,69.469 86.952,69.317 87.3,69.317 87.647,69.317 87.8,69.164 87.8,68.961 87.647,68.809 87.3,68.809 86.952,68.809 86.8,68.656 86.8,68.453 86.952,68.301 87.3,68.301 87.647,68.301 87.8,68.148 87.8,67.945 87.647,67.793 87.3,67.793 86.952,67.793 86.8,67.64 86.8,67.437 86.952,67.285 87.3,67.285 87.647,67.285 87.8,67.132 87.8,66.929 87.647,66.777 87.3,66.777 86.952,66.777 86.8,66.624 86.8,66.421 86.952,66.269 87.3,66.269 87.647,66.269 87.8,66.116 87.8,65.913 87.647,65.761 87.3,65.761 86.952,65.761 86.8,65.608 86.8,65.405 86.952,65.253 87.3,65.253 87.647,65.253 87.8,65.1 87.8,64.897 87.647,64.745 87.3,64.745 86.952,64.745 86.8,64.592 86.8,64.389 86.952,64.237 87.3,64.237 87.647,64.237 87.8,64.084 87.8,63.881 87.647,63.729 87.3,63.729 86.952,63.729 86.8,63.576 86.8,63.373 86.952,63.221 87.3,63.221 87.647,63.221 87.8,63.068 87.8,62.865 87.647,62.713 87.3,62.713 86.952,62.713 86.8,62.56 86.8,62.357 86.952,62.205 87.3,62.205 87.647,62.205 87.8,62.052 87.8,61.849 87.647,61.697 87.3,61.697 86.952,61.697 86.8,61.544 86.8,61.341 86.952,61.189 87.3,61.189 87.647,61.189 87.8,61.036 87.8,60.833 87.647,60.681 87.3,60.681 86.952,60.681 86.8,60.528 86.8,60.325 86.952,60.173 87.3,60.173 87.647,60.173 87.8,60.02 87.8,59.817 87.647,59.665 87.3,59.665 86.952,59.665 86.8,59.512 86.8,59.309 86.952,59.157 87.3,59.157 87.647,59.157 87.8,59.004 87.8,58.801 87.647,58.649 87.3,58.649 86.952,58.649 86.8,58.496 86.8,58.293 86.952,58.141 87.3,58.141 87.647,58.141 87.8,57.988 87.8,57.785 87.647,57.633 87.3,57.633 86.952,57.633 86.8,57.48 86.8,57.277 86.952,57.125 87.3,57.125 87.647,57.125 87.8,56.972 87.8,56.769 87.647,56.617 87.3,56.617 86.952,56.617 86.8,56.464 86.8,56.261 86.952,56.109 87.3,56.109 87.647,56.109 87.8,55.956 87.8,55.753 87.647,55.601 87.3,55.601 86.952,55.601 86.8,55.448 86.8,55.245 86.952,55.093 87.3,55.093 87.647,55.093 87.8,54.94 87.8,54.737 87.647,54.585 87.3,54.585 86.952,54.585 86.8,54.432 86.8,54.229 86.952,54.077 87.3,54.077 87.647,54.077 87.8,53.924 87.8,53.721 87.647,53.569 87.3,53.569 86.952,53.569 86.8,53.416 86.8,53.213 86.952,53.061 87.3,53.061 87.647,53.061 87.8,52.908 87.8,52.705 87.647,52.553 87.3,52.553 86.952,52.553 86.8,52.4 86.8,52.197 86.952,52.045 87.3,52.045 87.647,52.045 87.8,51.892 87.8,51.689 87.647,51.537 87.3,51.537 86.952,51.537 86.8,51.384 86.8,51.181 86.952,51.029 87.3,51.029 87.647,51.029 87.8,50.876 87.8,50.673 87.647,50.521 87.3,50.521 86.952,50.521 86.8,50.368 86.8,50.165 86.952,50.013 87.3,50.013 87.647,50.013 87.8,49.86 87.8,49.657 87.647,49.505 87.3,49.505 86.952,49.505 86.8,49.352 86.8,49.149 86.952,48.997 87.3,48.997 87.647,48.997 87.8,48.844 87.8,48.641 87.647,48.489 87.3,48.489 86.952,48.489 86.8,48.336 86.8,48.133 86.952,47.981 87.3,47.981 87.647,47.981 87.8,47.828 87.8,47.625 87.647,47.473 87.3,47.473 86.952,47.473 86.8,47.32 86.8,47.117 86.952,46.965 87.3,46.965 87.647,46.965 87.8,46.812 87.8,46.609 87.647,46.457 87.3,46.457 86.952,46.457 86.8,46.304 86.8,46.101 86.952,45.949 87.3,45.949 87.647,45.949 87.8,45.796 87.8,45.593 87.647,45.441 87.3,45.441 86.952,45.441 86.8,45.288 86.8,45.085 86.952,44.933 87.3,44.933 87.647,44.933 87.8,44.78 87.8,44.577 87.647,44.425 87.3,44.425 86.952,44.425 86.8,44.272 86.8,44.069 86.952,43.917 87.3,43.917 87.647,43.917 87.8,43.764 87.8,43.561 87.647,43.409 87.3,43.409 86.952,43.409 86.8,43.256 86.8,43.053 86.952,42.901 87.3,42.901 87.647,42.901 87.8,42.748 87.8,42.545 87.647,42.393 87.3,42.393 86.952,42.393 86.8,42.24 86.8,42.037 86.952,41.885 87.3,41.885 87.647,41.885 87.8,41.732 87.8,41.529 87.647,41.377 87.3,41.377 86.952,41.377 86.8,41.224 86.8,41.021 86.952,40.869 87.3,40.869 87.647,40.869 87.8,40.716 87.8,40.513 87.647,40.361 87.3,40.361 86.952,40.361 86.8,40.208 86.8,40.005 86.952,39.853 87.3,39.853 87.647,39.853 87.8,39.7 87.8,39.497 87.647,39.345 87.3,39.345 86.952,39.345 86.8,39.192 86.8,38.989 86.952,38.837 87.3,38.837 87.647,38.837 87.8,38.684 87.8,38.481 87.647,38.329 87.3,38.329 86.952,38.329 86.8,38.176 86.8,37.973 86.952,37.821 87.3,37.821 87.647,37.821 87.8,37.668 87.8,37.465 87.647,37.313 87.3,37.313 86.952,37.313 86.8,37.16 86.8,36.957 86.952,36.805 87.147,36.805 87.3,36.652 87.3,33.503 87.3,22.047 89.7,19.647 P2.45@89.7,12.425
W16: P2.40 | length 1.7
  Bottom Layer w0.254: v2(87.3,6.948) P2.40@87.3,8.625
XCLK_1: P1.8 P2.12 | length 132.3
  Top Layer w0.254: P1.8@26.187,30.871 27.549,32.233 31.572,32.233 38.633,39.294 38.633,48.057 40.665,50.089 41.097,50.089 41.199,50.089 41.351,50.241 41.351,50.436 41.504,50.589 41.707,50.589 41.859,50.436 41.859,50.089 41.859,49.741 42.012,49.589 42.215,49.589 42.367,49.741 42.367,50.089 42.367,50.436 42.52,50.589 42.723,50.589 42.875,50.436 42.875,50.089 42.875,49.741 43.028,49.589 43.231,49.589 43.383,49.741 43.383,50.089 43.383,50.436 43.536,50.589 43.739,50.589 43.891,50.436 43.891,50.089 43.891,49.741 44.044,49.589 44.247,49.589 44.399,49.741 44.399,50.089 44.399,50.436 44.552,50.589 44.755,50.589 44.907,50.436 44.907,50.089 44.907,49.741 45.06,49.589 45.263,49.589 45.415,49.741 45.415,50.089 45.415,50.436 45.568,50.589 45.771,50.589 45.923,50.436 45.923,50.089 45.923,49.741 46.076,49.589 46.279,49.589 46.431,49.741 46.431,50.089 46.431,50.436 46.584,50.589 46.787,50.589 46.939,50.436 46.939,50.089 46.939,49.741 47.092,49.589 47.295,49.589 47.447,49.741 47.447,50.089 47.447,50.436 47.6,50.589 47.803,50.589 47.955,50.436 47.955,50.089 47.955,49.741 48.108,49.589 48.311,49.589 48.463,49.741 48.463,50.089 48.463,50.436 48.616,50.589 48.819,50.589 48.971,50.436 48.971,50.089 48.971,49.741 49.124,49.589 49.327,49.589 49.479,49.741 49.479,50.089 49.479,50.436 49.632,50.589 49.835,50.589 49.987,50.436 49.987,50.089 49.987,49.741 50.14,49.589 50.343,49.589 50.495,49.741 50.495,50.089 50.495,50.436 50.648,50.589 50.851,50.589 51.003,50.436 51.003,50.089 51.003,49.741 51.156,49.589 51.359,49.589 51.511,49.741 51.511,50.089 51.511,50.436 51.664,50.589 51.867,50.589 52.019,50.436 52.019,50.089 52.019,49.741 52.172,49.589 52.375,49.589 52.527,49.741 52.527,50.089 52.527,50.436 52.68,50.589 52.883,50.589 53.035,50.436 53.035,50.089 53.035,49.741 53.188,49.589 53.391,49.589 53.543,49.741 53.543,50.089 53.543,50.436 53.696,50.589 53.899,50.589 54.051,50.436 54.051,50.089 54.051,49.741 54.204,49.589 54.407,49.589 54.559,49.741 54.559,50.089 54.559,50.436 54.712,50.589 54.915,50.589 55.067,50.436 55.067,50.089 55.067,49.741 55.22,49.589 55.423,49.589 55.575,49.741 55.575,49.936 55.728,50.089 56.286,50.089 56.82,50.089 58.344,48.565 58.344,47.6 58.344,47.498 58.496,47.346 58.691,47.346 58.844,47.193 58.844,46.99 58.691,46.838 58.344,46.838 57.996,46.838 57.844,46.685 57.844,46.482 57.996,46.33 58.344,46.33 58.691,46.33 58.844,46.177 58.844,45.974 58.691,45.822 58.344,45.822 57.996,45.822 57.844,45.669 57.844,45.466 57.996,45.314 58.344,45.314 58.691,45.314 58.844,45.161 58.844,44.958 58.691,44.806 58.344,44.806 57.996,44.806 57.844,44.653 57.844,44.45 57.996,44.298 58.344,44.298 58.691,44.298 58.844,44.145 58.844,43.942 58.691,43.79 58.344,43.79 57.996,43.79 57.844,43.637 57.844,43.434 57.996,43.282 58.344,43.282 58.691,43.282 58.844,43.129 58.844,42.926 58.691,42.774 58.344,42.774 57.996,42.774 57.844,42.621 57.844,42.418 57.996,42.266 58.344,42.266 58.691,42.266 58.844,42.113 58.844,41.91 58.691,41.758 58.344,41.758 57.996,41.758 57.844,41.605 57.844,41.402 57.996,41.25 58.344,41.25 58.691,41.25 58.844,41.097 58.844,40.894 58.691,40.742 58.344,40.742 57.996,40.742 57.844,40.589 57.844,40.386 57.996,40.234 58.344,40.234 58.691,40.234 58.844,40.081 58.844,39.878 58.691,39.726 58.344,39.726 57.996,39.726 57.844,39.573 57.844,39.37 57.996,39.218 58.191,39.218 58.344,39.065 58.344,38.862 58.344,37.719 76.1,19.963 v2(76.1,6.948)
  Bottom Layer w0.254: v2(76.1,6.948) P2.12@76.1,8.625
XCLK_2: P2.30 P3.8 | length 132
  Top Layer w0.254: P3.8@26.187,80.871 27.557,79.502 41.859,79.502 44.298,77.064 44.298,72.492 52.076,64.713 68.917,64.713 72.949,60.681 72.949,60.071 72.949,59.969 73.101,59.817 73.296,59.817 73.449,59.665 73.449,59.461 73.296,59.309 72.949,59.309 72.601,59.309 72.449,59.157 72.449,58.953 72.601,58.801 72.949,58.801 73.296,58.801 73.449,58.649 73.449,58.445 73.296,58.293 72.949,58.293 72.601,58.293 72.449,58.141 72.449,57.937 72.601,57.785 72.949,57.785 73.296,57.785 73.449,57.633 73.449,57.429 73.296,57.277 72.949,57.277 72.601,57.277 72.449,57.125 72.449,56.921 72.601,56.769 72.949,56.769 73.296,56.769 73.449,56.617 73.449,56.413 73.296,56.261 72.949,56.261 72.601,56.261 72.449,56.109 72.449,55.905 72.601,55.753 72.949,55.753 73.296,55.753 73.449,55.601 73.449,55.397 73.296,55.245 72.949,55.245 72.601,55.245 72.449,55.093 72.449,54.889 72.601,54.737 72.949,54.737 73.296,54.737 73.449,54.585 73.449,54.381 73.296,54.229 72.949,54.229 72.601,54.229 72.449,54.077 72.449,53.873 72.601,53.721 72.949,53.721 73.296,53.721 73.449,53.569 73.449,53.365 73.296,53.213 72.949,53.213 72.601,53.213 72.449,53.061 72.449,52.857 72.601,52.705 72.949,52.705 73.296,52.705 73.449,52.553 73.449,52.349 73.296,52.197 72.949,52.197 72.601,52.197 72.449,52.045 72.449,51.841 72.601,51.689 72.949,51.689 73.296,51.689 73.449,51.537 73.449,51.333 73.296,51.181 72.949,51.181 72.601,51.181 72.449,51.029 72.449,50.825 72.601,50.673 72.949,50.673 73.296,50.673 73.449,50.521 73.449,50.317 73.296,50.165 72.949,50.165 72.601,50.165 72.449,50.013 72.449,49.809 72.601,49.657 72.949,49.657 73.296,49.657 73.449,49.505 73.449,49.301 73.296,49.149 72.949,49.149 72.601,49.149 72.449,48.997 72.449,48.793 72.601,48.641 72.796,48.641 72.949,48.489 72.949,47.422 72.949,29.286 83.3,18.935 v2(83.3,10.302)
  Bottom Layer w0.254: P2.30@83.3,8.625 v2(83.3,10.302)
XCLK_3: P2.48 P4.8 | length 131.8
  Top Layer w0.254: P4.8@76.187,80.871 77.404,79.654 85.065,79.654 88.494,76.225 88.494,50.317 88.494,50.089 88.646,49.936 88.841,49.936 88.994,49.784 88.994,49.581 88.841,49.428 88.494,49.428 88.146,49.428 87.994,49.276 87.994,49.073 88.146,48.92 88.494,48.92 88.841,48.92 88.994,48.768 88.994,48.565 88.841,48.412 88.494,48.412 88.146,48.412 87.994,48.26 87.994,48.057 88.146,47.904 88.494,47.904 88.841,47.904 88.994,47.752 88.994,47.549 88.841,47.396 88.494,47.396 88.146,47.396 87.994,47.244 87.994,47.041 88.146,46.888 88.494,46.888 88.841,46.888 88.994,46.736 88.994,46.533 88.841,46.38 88.494,46.38 88.146,46.38 87.994,46.228 87.994,46.025 88.146,45.872 88.494,45.872 88.841,45.872 88.994,45.72 88.994,45.517 88.841,45.364 88.494,45.364 88.146,45.364 87.994,45.212 87.994,45.009 88.146,44.856 88.494,44.856 88.841,44.856 88.994,44.704 88.994,44.501 88.841,44.348 88.494,44.348 88.146,44.348 87.994,44.196 87.994,43.993 88.146,43.84 88.494,43.84 88.841,43.84 88.994,43.688 88.994,43.485 88.841,43.332 88.494,43.332 88.146,43.332 87.994,43.18 87.994,42.977 88.146,42.824 88.494,42.824 88.841,42.824 88.994,42.672 88.994,42.469 88.841,42.316 88.494,42.316 88.146,42.316 87.994,42.164 87.994,41.961 88.146,41.808 88.494,41.808 88.841,41.808 88.994,41.656 88.994,41.453 88.841,41.3 88.494,41.3 88.146,41.3 87.994,41.148 87.994,40.945 88.146,40.792 88.494,40.792 88.841,40.792 88.994,40.64 88.994,40.437 88.841,40.284 88.494,40.284 88.146,40.284 87.994,40.132 87.994,39.929 88.146,39.776 88.494,39.776 88.841,39.776 88.994,39.624 88.994,39.421 88.841,39.268 88.494,39.268 88.146,39.268 87.994,39.116 87.994,38.913 88.146,38.76 88.494,38.76 88.841,38.76 88.994,38.608 88.994,38.405 88.841,38.252 88.494,38.252 88.146,38.252 87.994,38.1 87.994,37.897 88.146,37.744 88.494,37.744 88.841,37.744 88.994,37.592 88.994,37.389 88.841,37.236 88.494,37.236 88.146,37.236 87.994,37.084 87.994,36.881 88.146,36.728 88.494,36.728 88.841,36.728 88.994,36.576 88.994,36.373 88.841,36.22 88.494,36.22 88.146,36.22 87.994,36.068 87.994,35.865 88.146,35.712 88.494,35.712 88.841,35.712 88.994,35.56 88.994,35.357 88.841,35.204 88.494,35.204 88.146,35.204 87.994,35.052 87.994,34.849 88.146,34.696 88.494,34.696 88.841,34.696 88.994,34.544 88.994,34.341 88.841,34.188 88.494,34.188 88.146,34.188 87.994,34.036 87.994,33.833 88.146,33.68 88.494,33.68 88.841,33.68 88.994,33.528 88.994,33.325 88.841,33.172 88.494,33.172 88.146,33.172 87.994,33.02 87.994,32.817 88.146,32.664 88.494,32.664 88.841,32.664 88.994,32.512 88.994,32.309 88.841,32.156 88.494,32.156 88.146,32.156 87.994,32.004 87.994,31.801 88.146,31.648 88.494,31.648 88.841,31.648 88.994,31.496 88.994,31.293 88.841,31.14 88.494,31.14 88.146,31.14 87.994,30.988 87.994,30.785 88.146,30.632 88.494,30.632 88.841,30.632 88.994,30.48 88.994,30.277 88.841,30.124 88.494,30.124 88.146,30.124 87.994,29.972 87.994,29.769 88.146,29.616 88.494,29.616 88.841,29.616 88.994,29.464 88.994,29.261 88.841,29.108 88.494,29.108 88.146,29.108 87.994,28.956 87.994,28.753 88.146,28.6 88.494,28.6 88.841,28.6 88.994,28.448 88.994,28.245 88.841,28.092 88.494,28.092 88.146,28.092 87.994,27.94 87.994,27.737 88.146,27.584 88.494,27.584 88.841,27.584 88.994,27.432 88.994,27.229 88.841,27.076 88.494,27.076 88.146,27.076 87.994,26.924 87.994,26.721 88.146,26.568 88.494,26.568 88.841,26.568 88.994,26.416 88.994,26.213 88.841,26.06 88.494,26.06 88.146,26.06 87.994,25.908 87.994,25.705 88.146,25.552 88.494,25.552 88.841,25.552 88.994,25.4 88.994,25.197 88.841,25.044 88.494,25.044 88.146,25.044 87.994,24.892 87.994,24.689 88.146,24.536 88.494,24.536 88.841,24.536 88.994,24.384 88.994,24.181 88.841,24.028 88.494,24.028 88.146,24.028 87.994,23.876 87.994,23.673 88.146,23.52 88.494,23.52 88.841,23.52 88.994,23.368 88.994,23.165 88.841,23.012 88.494,23.012 88.146,23.012 87.994,22.86 87.994,22.657 88.146,22.504 88.494,22.504 88.841,22.504 88.994,22.352 88.994,22.149 88.841,21.996 88.494,21.996 88.146,21.996 87.994,21.844 87.994,21.641 88.146,21.488 88.341,21.488 88.494,21.336 88.494,21.234 88.494,19.761 90.478,17.777 90.478,6.97 v2(90.5,6.948)
  Bottom Layer w0.254: v2(90.5,6.948) P2.48@90.5,8.625
pads on no net: P1.0 P2.21 P2.22 P2.61 P2.62 P3.0 P4.0 U1.4
copper on no net:
  other v4: 69.6,2.5 97.8,2.5

## Polygon pours and split planes (outlines as drawn)
GND on Top Layer "Top Layer-No Net" (solid, remove dead copper, pour order 2): 100,5 67,5 67,20 2.5,20 2.5,100 97.5,100 98,100 98.5,99.5 99,99 99.5,99 99.5,98.5 100,98 100,97.5
GND on Bottom Layer "Top Layer-No Net" (solid, remove dead copper, pour order 4): 100,5 67,5 67,20 2.5,20 2.5,100 98,100 98.5,99.5 99,99.5 99.5,99 99.5,98.5 100,98

## Silkscreen, mask and mechanical layers (free items; w line width, h text height)
Top Overlay:
  text "Cam 2" at 1.5,92 h3 r270
  text "Cam 1" at 51.5,91.5 h3 r270
  text "@Nov25,2020" at 3,69 h1 r270
  text "Designed by LiuYang" at 6,69 h1 r270
  text "Triple Cam" at 9,69 h1 r270
  text "Cam 3" at 1.5,42 h3 r270
Bottom Overlay:
  text "JLCJLCJLCJLC" at 90,1.5 h1
Mechanical 1:
  the board outline again, w0.254